# EAGLE board lidarsee PCB_r2 (EAGLE 7.7.0)
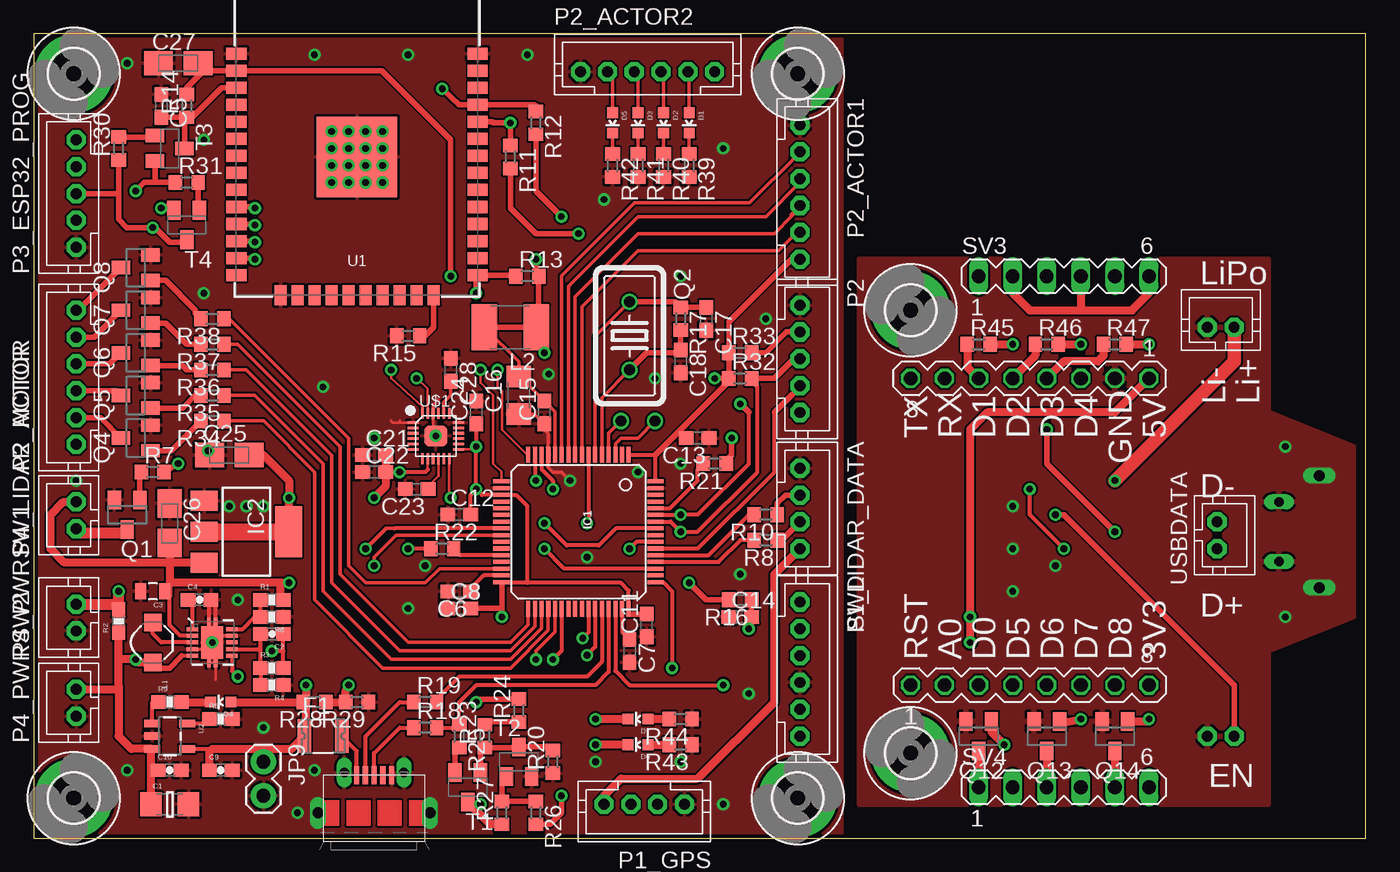
[diagram p0: board, top side]
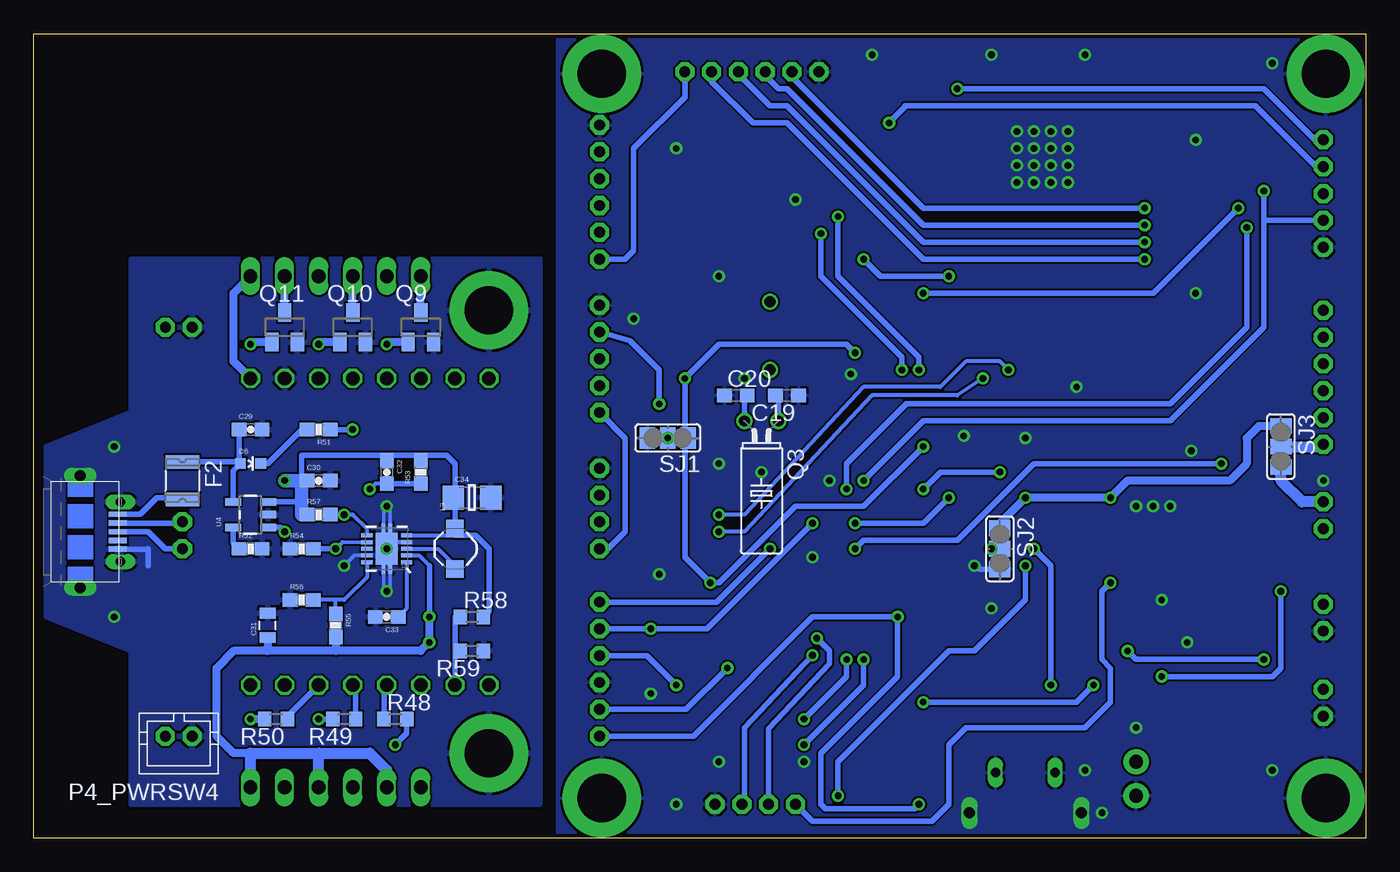
[diagram p1: board, bottom side, seen from below]

Size 99.37 x 60 mm. Coordinates in mm from the lower left corner, seen from the top.
Outline: 0,0 99.37,0 99.37,60 0,60 0,0
Copper layers (1*16): Top 0.035mm / dielectric 1.5mm / Bottom 0.035mm
Design rules "PCB-POOL Standard": minimum track width 0.15mm, minimum drill 0.3mm, track to track 0.15mm, track to pad 0.15mm, pad to pad 0.15mm, via to via 0.15mm, smd to smd 0.15mm, copper to edge 0.3mm, drill to drill 0.2mm, minimum pad ring 0.2mm, minimum via ring 0.15mm, stop-mask expansion 0.075mm, vias tented up to drill 0mil, thermal gap 0.2mm

## Footprints (pad centres in the part's own frame; a part is rotated, then mirrored left to right if it is on the bottom)
1206 = smd 1.6 x 1.8: 1 -1.4,0; 2 1.4,0
0603-CAP = smd 1.1 x 1: 1 -0.85,0; 2 0.85,0
0805 = smd 0.8 x 1.2: 1 -0.9,0; 2 0.9,0
C0603 = smd 1.1 x 1: 1 -0.85,0; 2 0.85,0
C1206 = smd 1.6 x 1.8: 1 -1.4,0; 2 1.4,0
A/3216-18W = smd 2.15 x 1.8: + 1.475,0; - -1.475,0
LED-0603 = smd 0.8 x 0.8: A 0,-0.75; C 0,0.75
1210L = smd 1 x 2.5: 1 -1.4,0; 2 1.4,0
3,6-PAD = drill 3.6 pad 5.842: B3,6 0,0
LQFP64 = smd 1.2 x 0.3: 1 -5.75,3.75; 2 -5.75,3.25; 3 -5.75,2.75; 4 -5.75,2.25; 5 -5.75,1.75; 6 -5.75,1.25; 7 -5.75,0.75; 8 -5.75,0.25; 9 -5.75,-0.25; 10 -5.75,-0.75; 11 -5.75,-1.25; 12 -5.75,-1.75; 13 -5.75,-2.25; 14 -5.75,-2.75; 15 -5.75,-3.25; 16 -5.75,-3.75; 33 5.75,-3.75; 34 5.75,-3.25; 35 5.75,-2.75; 36 5.75,-2.25; 37 5.75,-1.75; 38 5.75,-1.25; 39 5.75,-0.75; 40 5.75,-0.25; 41 5.75,0.25; 42 5.75,0.75; 43 5.75,1.25; 44 5.75,1.75; 45 5.75,2.25; 46 5.75,2.75; 47 5.75,3.25; 48 5.75,3.75 | smd 0.3 x 1.2: 17 -3.75,-5.75; 18 -3.25,-5.75; 19 -2.75,-5.75; 20 -2.25,-5.75; 21 -1.75,-5.75; 22 -1.25,-5.75; 23 -0.75,-5.75; 24 -0.25,-5.75; 25 0.25,-5.75; 26 0.75,-5.75; 27 1.25,-5.75; 28 1.75,-5.75; 29 2.25,-5.75; 30 2.75,-5.75; 31 3.25,-5.75; 32 3.75,-5.75; 49 3.75,5.75; 50 3.25,5.75; 51 2.75,5.75; 52 2.25,5.75; 53 1.75,5.75; 54 1.25,5.75; 55 0.75,5.75; 56 0.25,5.75; 57 -0.25,5.75; 58 -0.75,5.75; 59 -1.25,5.75; 60 -1.75,5.75; 61 -2.25,5.75; 62 -2.75,5.75; 63 -3.25,5.75; 64 -3.75,5.75
SOT223 = smd 1.5 x 2: 1 -2.3,-3.15; 2 0,-3.15; 3 2.3,-3.15 | smd 3.8 x 2: 4 0,3.15
1X02 = drill 1.016 pad 1.88: 1 0,0; 2 2.54,0
CDRH2D09 = smd 1.3 x 1.3: P$1 -1.5,0; P$2 1.5,0
L1812 = smd 1.9 x 3.4: 1 -1.95,0; 2 1.95,0
JST-PH4 = drill 0.813 pad 1.422 octagon: 1 0,0; 2 -2,0; 3 -4,0; 4 -6,0
JST-PH5 = drill 0.813 pad 1.422 octagon: 1 0,0; 2 -2,0; 3 -4,0; 4 -6,0; 5 -8,0
JST-PH6 = drill 0.813 pad 1.422 octagon: 1 0,0; 2 -2,0; 3 -4,0; 4 -6,0; 5 -8,0; 6 -10,0
JST-PH2 = drill 0.813 pad 1.422 octagon: 1 0,0; 2 -2,0
SOT23 = smd 1 x 1.4: 1 -0.95,-1.1; 2 0.95,-1.1; 3 0,1.1
HC18U-V = drill 0.813: 1 -2.54,0; 2 2.54,0
TC38H = drill 0.813: 1 -1.27,0; 2 1.27,0
0603-RES = smd 1.1 x 1: 1 -0.85,0; 2 0.85,0
R0603 = smd 1 x 1.1: 1 -0.85,0; 2 0.85,0
SJ_2 = smd 1.168 x 1.6: 1 -1.524,0; 2 0,0; 3 1.524,0
MA08-1S = drill 1.016 octagon: 1 -8.89,0; 2 -6.35,0; 3 -3.81,0; 4 -1.27,0; 5 1.27,0; 6 3.81,0; 7 6.35,0; 8 8.89,0
MA06-1 = drill 1.016 long: 1 -6.35,0; 2 -3.81,0; 3 -1.27,0; 4 1.27,0; 5 3.81,0; 6 6.35,0
SOT23-BEC = smd 1 x 1.4: B -0.95,-1.1; C 0,1.1; E 0.95,-1.1
ESP-WROOM-03 = smd 0.9 x 1.5: 1 7.7,9; 2 6.43,9; 3 5.16,9; 4 3.89,9; 5 2.62,9; 6 1.35,9; 7 0.08,9; 8 -1.19,9; 9 -2.46,9; 10 -3.73,9; 11 -5,9; 12 -6.27,9; 13 -7.54,9; 14 -8.81,9; 25 -8.81,-9; 26 -7.54,-9; 27 -6.27,-9; 28 -5,-9; 29 -3.73,-9; 30 -2.46,-9; 31 -1.19,-9; 32 0.08,-9; 33 1.35,-9; 34 2.62,-9; 35 3.89,-9; 36 5.16,-9; 37 6.43,-9; 38 7.7,-9 | smd 1.5 x 0.9: 15 -10.3,5.715; 16 -10.3,4.445; 17 -10.3,3.175; 18 -10.3,1.905; 19 -10.3,0.635; 20 -10.3,-0.635; 21 -10.3,-1.905; 22 -10.3,-3.175; 23 -10.3,-4.445; 24 -10.3,-5.715 | smd 6 x 6: GND 0,0
SOT23-5 = smd 0.55 x 1.2: 1 -0.95,-1.3; 2 0,-1.3; 3 0.95,-1.3; 4 0.95,1.3; 5 -0.95,1.3
QFN-10_PAD = smd 0.297 x 0.85: 1 -1,-1.475; 2 -0.5,-1.475; 3 0,-1.475; 4 0.5,-1.475; 5 1,-1.475; 6 1,1.475; 7 0.5,1.475; 8 0,1.475; 9 -0.5,1.475; 10 -1,1.475 | smd 0.7 x 0.28: 11 -1.5,0.25; 12 -1.5,-0.25; 13 1.5,0.25; 14 1.5,-0.25 | smd 2.4 x 1.65: 15 0,0
LEAD-QFN24 = smd 0.8 x 0.2: 1 -1.7,1; 2 -1.7,0.6; 3 -1.7,0.2; 4 -1.7,-0.2; 5 -1.7,-0.6; 6 -1.7,-1; 13 1.7,-1; 14 1.7,-0.6; 15 1.7,-0.2; 16 1.7,0.2; 17 1.7,0.6; 18 1.7,1 | smd 0.2 x 0.8: 7 -1,-1.7; 8 -0.6,-1.7; 9 -0.2,-1.7; 10 0.2,-1.7; 11 0.6,-1.7; 12 1,-1.7; 19 1,1.7; 20 0.6,1.7; 21 0.2,1.7; 22 -0.2,1.7; 23 -0.6,1.7; 24 -1,1.7 | smd 1.7 x 1.54: 25 0,0
47589-0001 = smd 1.35 x 0.4: 1 2.8,1.3; 2 2.8,0.65; 3 2.8,0; 4 2.8,-0.65; 5 2.8,-1.3 | drill 0.8 pad 0.95 long: CASING1 0,4.175; CASING2 0,-4.175 | drill 0.7 pad 0.9 long: CASING3 3,2.225; CASING4 3,-2.225

## Placement (x,y rotation side)
C1  10uF  [1206]  10.16,2.54 0 top
C2  0.1uF  [0603-CAP]  17.78,15.24 180 top
C3  100n  [0805]  8.89,18.41 180 top
C4  0.1uF  [0603-CAP]  12.38,17.78 0 top
C5  100n  [C0603]  9.53,54.61 270 top
C6  2.2µF 6.3V  [C0603]  31.75,18.41 180 top
C7  2.2µF 6.3V  [C0603]  44.45,13.97 270 top
C8  100n  [C0603]  31.75,17.14 0 top
C9  4.7uF  [0603-CAP]  13.97,5.08 0 top
C10  4.7uF  [0603-CAP]  10.16,5.08 0 top
C11  100n  [C0603]  45.72,15.88 90 top
C12  100n  [C0603]  31.75,24.13 0 top
C13  100n  [C0603]  49.53,29.84 180 top
C14  100n  [C0603]  52.7,16.51 0 top
C15  100n  [C0603]  38.1,31.75 90 top
C16  10u 10V  [C1206]  36.2,33.02 90 top
C17  27p  [C0603]  50.16,38.73 270 top
C18  27p  [C0603]  48.26,35.56 270 top
C19  10p  [C0603]  43.18,33.02 180 bottom
C20  10p  [C0603]  46.99,33.02 0 bottom
C21  1µ  [C0603]  25.4,28.57 0 top
C22  100n  [C0603]  25.4,27.3 0 top
C23  100n  [C0603]  28.57,26.04 180 top
C24  10n  [C0603]  33.02,31.75 90 top
C25  33µF  [A/3216-18W]  14.61,28.57 0 top
C26  33µF  [A/3216-18W]  10.16,23.5 270 top
C27  33µF  [A/3216-18W]  10.79,57.78 0 top
C28  2.2n  [C0603]  31.11,34.92 270 top
C29  4.7uF  [0603-CAP]  83.19,30.48 0 bottom
C30  4.7uF  [0603-CAP]  78.11,26.67 0 bottom
C31  100n  [0805]  81.92,15.88 90 bottom
C32  0.1uF  [0603-CAP]  73.03,27.3 270 bottom
C33  0.1uF  [0603-CAP]  73.03,16.51 180 bottom
C34  10uF  [1206]  66.67,25.4 0 bottom
D1  red  [LED-0603]  48.9,53.34 180 top
D2  red  [LED-0603]  46.99,53.34 180 top
D3  red  [LED-0603]  45.09,53.34 180 top
D4  red  [LED-0603]  13.97,10.16 90 top
D5  red  [LED-0603]  43.18,53.34 180 top
D6  red  [LED-0603]  45.09,6.99 90 top
D7  red  [LED-0603]  45.09,8.89 90 top
D8  red  [LED-0603]  83.19,27.94 270 bottom
F1  1210L010  [1210L]  21.59,7.62 0 top
F2  1210L010  [1210L]  88.27,26.67 270 bottom
H1  MOUNT-PAD-ROUND3.6  [3,6-PAD]  65.41,6.35 90 top
H2  MOUNT-PAD-ROUND3.6  [3,6-PAD]  65.41,39.37 90 top
H5  MOUNT-PAD-ROUND3.6  [3,6-PAD]  3,3 0 top
H6  MOUNT-PAD-ROUND3.6  [3,6-PAD]  57,3 0 top
H7  MOUNT-PAD-ROUND3.6  [3,6-PAD]  57,57 0 top
H8  MOUNT-PAD-ROUND3.6  [3,6-PAD]  3,57 0 top
IC1  STM32F40X  [LQFP64]  40.64,22.86 270 top
IC2  LD1117ASTR  [SOT223]  15.88,22.86 270 top
JP9  IN  [1X02]  17.14,5.71 270 top
L1  4.7uH, 1.2A  [CDRH2D09]  8.89,14.61 270 top
L2  [L1812]  35.56,38.1 180 top
L3  4.7uH, 1.2A  [CDRH2D09]  67.94,21.59 90 bottom
P1_GPS  [JST-PH4]  42.55,2.54 180 top
P1_LIDAR_DATA  [JST-PH4]  57.15,21.59 270 top
P2  JST-PH5  [JST-PH5]  57.15,31.75 270 top
P2_ACTOR  [JST-PH6]  3.17,39.37 90 top
P2_ACTOR1  [JST-PH6]  57.15,43.18 270 top
P2_ACTOR2  [JST-PH6]  50.8,57.15 0 top
P3_ESP32_PROG  JST-PH5  [JST-PH5]  3.17,52.07 90 top
P4_LIDAR_MOTOR  [JST-PH2]  3.17,25.08 90 top
P4_PWRSW1  [JST-PH2]  3.17,17.46 90 top
P4_PWRSW2  [JST-PH2]  3.17,11.11 90 top
P4_PWRSW3  [JST-PH2]  89.53,38.1 0 top
P4_PWRSW4  [JST-PH2]  89.53,7.62 180 bottom
Q1  IRLML6344  [SOT23]  6.99,24.13 180 top
Q2  8MHz  [HC18U-V]  44.45,37.47 270 top
Q3  32768  [TC38H]  45.09,31.11 180 bottom
Q4  IRLML6344  [SOT23]  7.62,29.84 90 top
Q5  IRLML6344  [SOT23]  7.62,33.02 90 top
Q6  IRLML6344  [SOT23]  7.62,36.2 90 top
Q7  IRLML6344  [SOT23]  7.62,39.37 90 top
Q8  IRLML6344  [SOT23]  7.62,42.55 90 top
Q9  IRLML6344  [SOT23]  70.48,38.1 0 bottom
Q10  IRLML6344  [SOT23]  75.56,38.1 0 bottom
Q11  IRLML6344  [SOT23]  80.64,38.1 0 bottom
Q12  IRLML6344  [SOT23]  70.48,7.62 180 top
Q13  IRLML6344  [SOT23]  75.56,7.62 180 top
Q14  IRLML6344  [SOT23]  80.64,7.62 180 top
R1  1.2M  [0603-RES]  17.78,17.78 0 top
R2  10k  [0603-RES]  6.35,16.19 90 top
R3  2M  [0603-RES]  17.78,12.7 0 top
R4  220k  [0603-RES]  17.78,11.43 180 top
R5  2k  [0603-RES]  13.97,8.89 0 top
R6  220k  [0603-RES]  17.78,16.51 180 top
R7  10  [R0603]  8.89,27.3 0 top
R8  10  [R0603]  54.61,22.23 180 top
R9  470  [0603-RES]  10.16,10.16 0 top
R10  10  [R0603]  54.61,24.13 180 top
R11  10  [R0603]  35.56,50.8 270 top
R12  10  [R0603]  37.47,53.34 270 top
R13  10  [R0603]  36.83,41.91 0 top
R14  10  [R0603]  11.43,54.61 90 top
R15  10  [R0603]  27.94,37.47 180 top
R16  10  [R0603]  52.7,17.78 180 top
R17  1M  [R0603]  48.26,38.73 270 top
R18  22  [R0603]  29.21,8.26 0 top
R19  22  [R0603]  29.21,10.16 0 top
R20  33k  [R0603]  38.73,5.71 90 top
R21  33k  [R0603]  50.8,27.94 180 top
R22  33k  [R0603]  30.48,21.59 0 top
R23  10k  [R0603]  33.66,7.62 90 top
R24  22  [R0603]  36.2,9.53 90 top
R25  1k5  [R0603]  31.75,7.62 270 top
R26  1k  [R0603]  37.47,1.91 270 top
R27  47k  [R0603]  34.92,1.91 90 top
R28  15k  [R0603]  20.95,10.16 180 top
R29  22k  [R0603]  24.13,10.16 180 top
R30  12k  [R0603]  6.35,51.44 90 top
R31  12k  [R0603]  11.43,48.9 0 top
R32  33k  [R0603]  52.7,34.29 0 top
R33  33k  [R0603]  52.7,36.2 0 top
R34  10  [R0603]  13.34,31.11 180 top
R35  10  [R0603]  13.34,33.02 180 top
R36  10  [R0603]  13.34,34.92 180 top
R37  10  [R0603]  13.34,36.83 180 top
R38  10  [R0603]  13.34,38.73 180 top
R39  12k  [R0603]  48.9,50.16 270 top
R40  12k  [R0603]  46.99,50.16 270 top
R41  12k  [R0603]  45.09,50.16 270 top
R42  12k  [R0603]  43.18,50.16 270 top
R43  12k  [R0603]  48.26,6.99 180 top
R44  12k  [R0603]  48.26,8.89 180 top
R45  10  [R0603]  70.48,36.83 0 top
R46  10  [R0603]  75.56,36.83 0 top
R47  10  [R0603]  80.64,36.83 0 top
R48  10  [R0603]  72.39,8.89 0 bottom
R49  10  [R0603]  76.2,8.89 180 bottom
R50  10  [R0603]  81.28,8.89 180 bottom
R51  470  [0603-RES]  78.11,30.48 180 bottom
R52  2k  [0603-RES]  83.19,21.59 0 bottom
R53  2M  [0603-RES]  70.48,27.3 90 bottom
R54  220k  [0603-RES]  79.38,21.59 0 bottom
R55  1.2M  [0603-RES]  76.83,15.88 270 bottom
R56  220k  [0603-RES]  79.38,17.78 0 bottom
R57  10k  [0603-RES]  78.11,24.13 0 bottom
R58  10  [R0603]  66.67,16.51 0 bottom
R59  10  [R0603]  66.67,13.97 180 bottom
SJ1  [SJ_2]  52.07,29.84 180 bottom
SJ2  [SJ_2]  27.3,21.59 270 bottom
SJ3  [SJ_2]  6.35,29.21 270 bottom
SV1  [MA08-1S]  74.3,34.29 180 top
SV2  [MA08-1S]  74.3,11.43 0 top
SV3  [MA06-1]  76.83,41.91 0 top
SV4  [MA06-1]  76.83,3.81 0 top
SWD  [JST-PH6]  57.15,7.62 270 top
T1  [SOT23-BEC]  32.38,3.81 180 top
T2  [SOT23-BEC]  36.2,5.71 0 top
T3  [SOT23-BEC]  10.16,51.44 270 top
T4  [SOT23-BEC]  11.43,45.72 180 top
U1  ESP-WROOM-03  [ESP-WROOM-03]  24.13,50.8 90 top
U2  MCP73831  [SOT23-5]  10.16,7.62 270 top
U3  TPS61200  [QFN-10_PAD]  13.34,14.61 270 top
U4  MCP73831  [SOT23-5]  83.19,24.13 90 bottom
U5  TPS61200  [QFN-10_PAD]  73.03,21.59 90 bottom
U$1  MPU-9250  [LEAD-QFN24]  30,30 0 top
U$2  MICRO-USB-RECEPTACLE47589-0001  [47589-0001]  25.4,1.91 90 top
U$3  MICRO-USB-RECEPTACLE47589-0001  [47589-0001]  95.89,22.86 0 bottom
USBDATA  [JST-PH2]  88.27,21.59 270 top

## Library data of the parts
C1 C34 = CH_passive; MF: KEMET; MPN: C1206C106K8RACTU; OC_FARNELL: 1288264
C2 C4 C32 C33 = SparkFun; MF: YAGEO (PHYCOMP); MPN: CC0603MRY5V9BB104; OC_FARNELL: 431989
C3 = CH_passive; MF: KEMET; MPN: C0603C104K5RACTU; OC_FARNELL: 1288255
C5 C8 C11-C15 C22 C23 = rcl; MF: KEMET; MPN: C0603C104K5RACTU; OC_FARNELL: 1288255
C6 C7 = rcl; MF: KEMET; MPN: C0603C225K9PACTU; OC_FARNELL: 1288257
C9 C10 C29 C30 = SparkFun; MF: KEMET; MPN: C0603C475K8PACTU; OC_FARNELL: 1572625
C16 = rcl; MF: KEMET; MPN: C1206C106K8RACTU; OC_FARNELL: 1288264
C17 C18 = rcl; MF: YAGEO (PHYCOMP); MPN: CC0603JRNPO9BN270; OC_FARNELL: 722017
C19 C20 = rcl; MF: AVX; MPN: 06035A102JAT2A; OC_FARNELL: 317202
C21 = rcl; MF: AVX; MPN: 0603YC105KAT2A; OC_FARNELL: 1658870
C24 = rcl; MF: YAGEO (PHYCOMP); MPN: CC0603KRX7R9BB103; OC_FARNELL: 722236
C25-C27 = rcl; MF: AVX; MPN: TPSA336M006R0600; OC_FARNELL: 2333095
C28 = rcl; MF: YAGEO (PHYCOMP); MPN: CC0603KRX7R9BB222; OC_FARNELL: 722194
C31 = CH_passive; MF: YAGEO (PHYCOMP); MPN: CC0603MRY5V9BB104; OC_FARNELL: 431989
D1-D8 = SparkFun; MF: OSRAM; MPN: LSQ976-Z; OC_FARNELL: 1226390
F1 F2 = polyfuse-smd_10; MF: LITTELFUSE; MPN: 1210L010WR; OC_FARNELL: 1822206; OC_NEWARK: 18M4781
H1 H2 H5-H8 = holes_new; OC_FARNELL: unknown
IC1 = pel_stm32; MF: STMICROELECTRONICS; MPN: STM32F405RGT6; OC_FARNELL: 2064363
IC2 = v-reg; MF: ON SEMICONDUCTOR; MPN: NCP1117ST33T3G; OC_FARNELL: 1652366
JP9 = SparkFun; MF: JST (JAPAN SOLDERLESS TERMINALS); MPN: B2B-PH-K-S(LF)(SN); OC_FARNELL: 9491856
L1 L3 = SparkFun; MF: MURATA; MPN: LQH3NPN4R7MJ0L; OC_FARNELL: 2219271
L2 = rcl; OC_FARNELL: unknown
P1_GPS P1_LIDAR_DATA = jst-ph; MF: JST (JAPAN SOLDERLESS TERMINALS); MPN: B4B-PH-K-S(LF)(SN); OC_FARNELL: 9492437
P2 P3_ESP32_PROG = jst-ph; MF: JST (JAPAN SOLDERLESS TERMINALS); MPN: B5B-PH-K-S(LF)(SN); OC_FARNELL: 9492445
P2_ACTOR P2_ACTOR1 P2_ACTOR2 SWD = jst-ph; MF: JST (JAPAN SOLDERLESS TERMINALS); MPN: B6B-PH-K-S(LF)(SN); OC_FARNELL: 9492453
P4_LIDAR_MOTOR P4_PWRSW1-P4_PWRSW4 USBDATA = jst-ph; MF: JST (JAPAN SOLDERLESS TERMINALS); MPN: B2B-PH-K-S(LF)(SN); OC_FARNELL: 9491856
Q1 Q4-Q14 = myDBv7; MF: INFINEON; MPN: IRLML6344TRPBF; OC_FARNELL: 1857299
Q2 = crystal; MF: MULTICOMP; MPN: HC49S-8-30-50-70-30-ATF; OC_FARNELL: 1666997; OC_NEWARK: unknown
Q3 = crystal; MF: CITIZEN FINETECH MIYOTA; MPN: CFS206 32.768KDZB-UB; OC_FARNELL: 1457085; OC_NEWARK: unknown
R1 R55 = SparkFun; MF: MULTICOMP; MPN: MCMR06W2004FTL; OC_FARNELL: 2073340
R2 R57 = SparkFun; MF: MULTICOMP; MPN: MCMR06X1002FTL; OC_FARNELL: 2073349
R3 R53 = SparkFun; MF: KOA SPEER ELECTRONICS; MPN: RK73H1JTTD1204F; OC_FARNELL: 1811595
R4 R6 R54 R56 = SparkFun; MF: MULTICOMP; MPN: MCHP03W8F2203T5E; OC_FARNELL: 1576314
R5 R52 = SparkFun; MF: YAGEO (PHYCOMP); MPN: RC0603FR-072K2L.; OC_FARNELL: 9238522
R7 R8 R10-R16 R34-R38 R45-R50 R58 R59 = rcl; MF: VISHAY; MPN: CRCW060310R0FKEA; OC_FARNELL: 1469751
R9 R51 = SparkFun; MF: MULTICOMP; MPN: MCHP03W8F4700T5E; OC_FARNELL: 1576273
R17 = rcl; MF: VISHAY; MPN: CRCW06031M00FKEA; OC_FARNELL: 1469746
R18 R19 R24 = rcl; MF: VISHAY; MPN: CRCW060322R0FKEA; OC_FARNELL: 1469781
R20-R22 R32 R33 = rcl; MF: VISHAY; MPN: CRCW060333K0FKEA; OC_FARNELL: 1469801
R23 = rcl; MF: MULTICOMP; MPN: MCMR06X1002FTL; OC_FARNELL: 2073349
R25 = rcl; MF: MULTICOMP; MPN: MCMR06X1501FTL; OC_FARNELL: 2073391
R26 = rcl; MF: VISHAY; MPN: CRCW06031K00FKEA; OC_FARNELL: 1469740
R27 = rcl; MF: VISHAY; MPN: CRCW060347K0FKEA; OC_FARNELL: 1469811
R28 = rcl; MF: VISHAY; MPN: CRCW060315K0FKEA; OC_FARNELL: 1469758
R29 = rcl; MF: TE CONNECTIVITY / NEOHM; MPN: CPF0603F4K22C1; OC_FARNELL: 1527541
R30 R31 R39-R44 = rcl; MF: MULTICOMP; MPN: MC0063W060312K8; OC_FARNELL: 1170832
SJ1-SJ3 = jumper; OC_FARNELL: unknown
SV1-SV4 = con-pin-header; OC_FARNELL: unknown
T1-T4 = transistor; MF: NEXPERIA; MPN: BC817,215; OC_FARNELL: 1081223
U1 = esp32; OC_FARNELL: unknown
U2 U4 = SparkFun; MF: MICROCHIP; MPN: MCP73831T-2ACI/OT; OC_FARNELL: 1332158
U3 U5 = SparkFun; MF: TEXAS INSTRUMENTS; MPN: TPS61200DRCT; OC_FARNELL: 1471238
U$1 = invensense; MF: INVENSENSE; MPN: MPU-6050; OC_FARNELL: 1864742
U$2 U$3 = con-molex-usb; MF: MOLEX; MPN: 47589-0001; OC_FARNELL: 1568023

## Nets
5VIN: C9.1 D4.A F1.1 JP9.1 R24.2 R28.2 U2.4
5VIN1: C29.1 D8.A F2.1 U4.4
+3V1: SV2.8
+3V3: C8.2 C11.2 C12.2 C13.2 C15.2 C16.2 C21.2 C22.2 C24.1 C25.+ C27.+ IC1.1 IC1.12 IC1.19 IC1.32 IC1.48 IC1.64 IC2.2 IC2.4 L2.1 L2.2 P2_ACTOR1.1 P2_ACTOR2.1 R13.2 R14.2 R16.2 R27.1 R32.1 R33.1 SJ1.1 SJ2.1 SJ3.1 SWD.1 T1.C U1.2 U$1.8 U$1.13
+5V: C3.1 C26.+ IC2.3 P1_GPS.1 P1_LIDAR_DATA.1 P2.1 P4_LIDAR_MOTOR.1 R1.2 SJ3.3 U3.2
+5V1: C31.1 R55.2 SV1.1 SV3.2 SV3.4 SV3.6 SV4.2 SV4.4 SV4.6 U5.2
A0: R58.1 R59.2 SV2.2
BOOT0: IC1.60 R21.2
BOOT1: IC1.28 R22.2
D0: SV2.3
D1: R45.1 SV1.6
D2: R46.1 SV1.5
D3: R47.1 SV1.4
D4: SV1.3
D5: R48.1 SV2.4
D6: R49.1 SV2.5
D7: R50.1 SV2.6
D8: SV2.7
D+: R18.1 U$2.3
D+1: U$3.3 USBDATA.1
D-: R19.1 U$2.2
D-1: U$3.2 USBDATA.2
DISC: IC1.25 R26.2
EINT: IC1.54 P2.2
EN: P4_PWRSW1.1 R2.2 U3.6
EN1: P4_PWRSW4.1 R57.2 U5.6
ESP_DTR: IC1.14 P3_ESP32_PROG.3 R30.1 T4.C
ESP_EN: C5.2 R14.1 T3.C U1.3
ESP_RTS: IC1.15 P3_ESP32_PROG.4 R31.1 T3.E
ESP_RX: IC1.16 R11.2
ESP_RXD: P3_ESP32_PROG.2 R11.1 U1.34
ESP_TX: IC1.17 R12.2
ESP_TXD: P3_ESP32_PROG.1 R12.1 U1.35
FB: R1.1 R6.2 U3.10
FB1: R55.1 R56.2 U5.10
GND: C1.2 C3.2 C4.2 C5.1 C6.2 C7.2 C8.1 C9.2 C10.2 C11.1 C12.1 C13.1 C14.1 C15.1 C16.1 C17.2 C18.2 C19.1 C20.1 C21.1 C22.1 C23.2 C24.2 C25.- C26.- C27.- C28.1 H5.B3,6 H6.B3,6 H7.B3,6 H8.B3,6 IC1.13 IC1.18 IC1.63 IC2.1 JP9.2 P1_GPS.4 P1_LIDAR_DATA.4 P2.5 P2_ACTOR1.6 P2_ACTOR2.6 P3_ESP32_PROG.5 P4_PWRSW1.2 P4_PWRSW2.2 Q1.2 Q4.2 Q5.2 Q6.2 Q7.2 Q8.2 R4.1 R5.2 R6.1 R15.2 R20.1 R29.1 R39.2 R40.2 R41.2 R42.2 R43.1 R44.1 SJ1.3 SJ2.3 SWD.3 T2.E U1.1 U1.15 U1.38 U1.GND U2.2 U3.4 U3.9 U3.11 U3.12 U3.13 U3.14 U3.15 U$1.1 U$1.18 U$1.22 U$1.25 U$2.5 U$2.CASING1 U$2.CASING2 U$2.CASING3 U$2.CASING4
GND1: C29.2 C30.2 C31.2 C33.2 C34.2 H1.B3,6 H2.B3,6 P4_PWRSW3.2 P4_PWRSW4.2 Q9.2 Q10.2 Q11.2 Q12.2 Q13.2 Q14.2 R52.2 R54.1 R56.1 R59.1 SV1.2 U4.2 U5.4 U5.9 U5.11 U5.12 U5.13 U5.14 U5.15 U$3.5 U$3.CASING1 U$3.CASING2 U$3.CASING3 U$3.CASING4
IO0: R13.1 T4.E U1.25
IO2: R15.1 U1.24
LIDAR_PWM: IC1.51 R7.2
LIDAR_RX: IC1.53 R10.2
LIDAR_TX: IC1.52 R8.2
M1: IC1.30 R38.1
M2: IC1.33 R37.1
M3: IC1.34 R36.1
M4: IC1.35 R35.1
M5: IC1.36 R34.1
MPU_INT: IC1.57 U$1.12
N$1: C4.1 U3.1
N$2: L1.P$1 U3.3
N$3: C28.2 U$1.20
N$4: P4_LIDAR_MOTOR.2 Q1.3
N$5: Q1.1 R7.1
N$6: P1_LIDAR_DATA.2 R8.1
N$7: P1_LIDAR_DATA.3 R10.1
N$8: D4.C R9.2
N$9: C23.1 U$1.10
N$10: IC1.8 P2_ACTOR1.2
N$11: R5.1 U2.5
N$12: P2_ACTOR.5 Q4.3
N$13: R31.2 T4.B
N$14: R9.1 U2.1
N$15: P2_ACTOR.4 Q5.3
N$16: C17.1 IC1.6 Q2.1 R17.1
N$17: P2_ACTOR.3 Q6.3
N$18: P2_ACTOR.2 Q7.3
N$19: C18.1 IC1.5 Q2.2 R17.2
N$20: C19.2 IC1.4 Q3.1
N$21: C20.2 IC1.3 Q3.2
N$22: R20.2 R23.1 T1.B T2.C
N$23: R21.1 SJ1.2
N$24: R22.1 SJ2.2
N$25: P2_ACTOR.1 Q8.3
N$26: R25.2 T1.E
N$27: R23.2 R24.1
N$28: R26.1 R27.2 T2.B
N$29: R30.2 T3.B
N$30: P2_ACTOR.6 SJ3.2
N$31: Q4.1 R34.2
N$32: Q5.1 R35.2
N$33: Q6.1 R36.2
N$34: Q7.1 R37.2
N$35: Q8.1 R38.2
N$36: IC1.9 P2_ACTOR1.3
N$37: IC1.10 P2_ACTOR1.4
N$38: IC1.11 P2_ACTOR1.5
N$39: D5.A P2_ACTOR2.5 U1.10
N$40: D3.A P2_ACTOR2.4 U1.11
N$41: D2.A P2_ACTOR2.3 U1.12
N$42: D1.A P2_ACTOR2.2 U1.13
N$43: D1.C R39.1
N$44: D2.C R40.1
N$45: D3.C R41.1
N$46: D5.C R42.1
N$47: Q9.1 R45.2
N$48: D6.C IC1.37
N$49: D7.C IC1.38
N$50: D6.A R43.2
N$51: D7.A R44.2
N$52: Q10.1 R46.2
N$53: Q11.1 R47.2
N$54: Q9.3 SV3.1
N$55: Q10.3 SV3.3
N$56: Q11.3 SV3.5
N$57: Q12.1 R48.2
N$58: Q13.1 R49.2
N$59: Q14.1 R50.2
N$60: Q12.3 SV4.1
N$61: Q13.3 SV4.3
N$62: Q14.3 SV4.5
N$63: R52.1 U4.5
N$64: R51.1 U4.1
N$65: D8.C R51.2
N$66: L3.P$1 U5.3
N$67: C33.1 U5.1
NRST: C14.2 IC1.7 R16.1 SWD.5
RST: SV2.1
RX: SV1.7
SCL: IC1.58 P2.3 R32.2 U$1.23
SDA: IC1.59 P2.4 R33.2 U$1.24
SWCLK: IC1.49 SWD.2
SWDIO: IC1.46 SWD.4
TRACESWO: IC1.55 SWD.6
TX: SV1.8
UART1_TX: IC1.42 P1_GPS.2
UART2_RX: IC1.43 P1_GPS.3
USB_D+: IC1.45 R18.2 R25.1
USB_D-: IC1.44 R19.2
USBP_E: IC1.24 R28.1 R29.2
UVLO: C2.2 R3.1 R4.2 U3.7
UVLO1: C32.2 R53.1 R54.2 U5.7
VBATT: C1.1 C2.1 C10.1 L1.P$2 P4_PWRSW2.1 R2.1 R3.2 U2.3 U3.5
VBATT1: C30.1 C32.1 C34.1 L3.P$2 P4_PWRSW3.1 R53.2 R57.1 R58.2 U4.3 U5.5
VBUS: F1.2 U$2.1
VBUS1: F2.2 U$3.1
VCAP1: C6.1 IC1.31
VCAP2: C7.1 IC1.47

## Tracks (layer width: path | path; a pad name or v marks a point on that pad's centre or on a via)
5VIN  (via drill 0.5)
  Top 0.305: U2.4 13.34,6.67 13.12,6.46 | F1.1 20.19,7.75 20.32,8.26 | 20.32,10.16 R28.2 20.32,9.95
  Top 0.406: R24.2 33.23,10.38 v33.02,10.16
  Top 0.61: 13.34,6.67 17.14,6.67 | JP9.1 17.14,6.67 | D4.A R28.2 | v20.32,11.43 20.32,10.16 | 20.32,8.26 20.32,9.95 | 17.14,6.67 19.24,6.67 F1.1 | C9.1 13.12,6.46
  Bottom 0.406: v33.02,10.16 21.59,10.16 v20.32,11.43
5VIN1
  Bottom 0.406: U4.4 84.48,27.39 D8.A | C29.1 84.03,28.04 D8.A | F2.1 84.06,28.07 D8.A
+3V3  (via drill 0.5)
  Top 0.2: R13.2 37.47,41.91 | U$1.8 29.4,27.5 | U$1.13 32.81,29 v33.02,29.21 | 46.39,28.54 46.35,28.57 46.32,28.61 | R32.1 51.85,34.08 | 34.92,19.05 34.89,19.09 IC1.32 35.5,19.11 | 44.46,16.73 IC1.48 | C13.2 48.05,30.06 47.94,30.16
  Top 0.254: v38.1,36.2 38.1,37.51 L2.1 | IC1.12 38.89,31.81 C15.2 36.28,34.42 C16.2 36.2,35.52 L2.2
  Top 0.305: 19.05,22.86 IC2.4 | 29.4,27.5 29.21,27.3 v27.3,27.3 C22.2 | v33.02,26.04 33.45,25.61 IC1.19 35.98,25.61 36.83,24.77 36.83,19.05 | v33.02,26.04 v33.02,29.21 C24.1 | IC1.64 46.39,28.54 | IC1.1 46.32,28.61 | IC1.48 44.39,18.48 43.81,19.05 36.83,19.05 | 36.83,19.05 35.56,19.05 35.5,19.11 | C12.2 32.6,25.61 v33.02,26.04 | 32.22,2.54 T1.C
  Top 0.406: 51.85,34.08 47.94,30.16 46.35,28.57 | v31.11,41.91 31.11,52.07 25.95,57.23 U1.2 12.7,57.23 | 34.92,19.05 34.92,17.14 | 34.92,17.14 v34.92,16.51 | C11.2 44.46,16.73 | C8.2 34.92,17.14 | R16.2 50.16,17.78 v48.9,19.05 | P2_ACTOR1.1 56.52,43.18 51.85,38.52 R33.1 R32.1 v50.8,34.29 | v38.1,36.2 38.1,38.1 L2.1 | L2.1 L2.2 | 12.7,57.23 12.14,57.23 12.06,57.15 12.06,57.53 C27.+ | R14.2 11.43,55.96 12.7,57.23 | L2.1 37.68,38.1 R13.2 | 37.47,41.91 v37.47,43.18 | 32.22,2.54 v33.34,2.54
  Top 0.61: C21.2 C22.2 26.25,26.25 v25.4,25.4 | R27.1 34.04,1.05 T1.C | 19.05,22.86 v19.05,25.4 19.05,26.67 17.14,28.57 C25.+
  Top 1.27: IC2.2 IC2.4
  Bottom 0.2: v34.92,16.51 34.89,16.51 34.89,16.48 v34.92,16.51
  Bottom 0.305: SJ2.1 27.3,23.5 | SJ1.1 50.8,29.84
  Bottom 0.406: v33.02,26.04 31.75,27.3 v27.3,27.3 | v33.02,29.21 37.47,24.77 42.55,24.77 48.26,19.05 v48.9,19.05 50.8,20.95 50.8,29.84 v50.8,34.29 48.26,36.83 38.73,36.83 v38.1,36.2 | v31.11,41.91 36.2,41.91 v37.47,43.18 | SWD.1 50.16,7.62 41.27,16.51 v34.92,16.51 34.92,12.06 40.64,6.35 40.64,2.54 40.32,2.22 33.66,2.22 v33.34,2.54 | P2_ACTOR2.1 50.8,55.24 54.61,51.44 54.61,43.81 55.24,43.18 P2_ACTOR1.1
  Bottom 0.61: 27.3,23.5 v25.4,25.4 v19.05,25.4 17.78,26.67 10.16,26.67 8.89,27.94 8.89,29.84 8,30.73 SJ3.1
+5V  (via drill 0.5)
  Top 0.2: 18.43,19.04 18.43,19.07 | 19.04,19.07 v19.05,19.05
  Top 0.254: R1.2 18.41,17.78 18.43,17.8 | 18.43,19.04 18.41,19.05
  Top 0.305: U3.2 10.93,15.11 10.16,15.88 10.16,18.79 C3.1 10.19,18.02 10.19,19.05 10.16,19.05 | 10.16,20.32 10.4,20.56 10.16,20.56
  Top 0.406: 10.16,20.56 10.16,20.32
  Top 0.61: 10.16,20.32 10.16,19.05 | IC2.3 10.4,20.56 | P4_LIDAR_MOTOR.1 2.22,25.08 1.27,24.13 1.27,21.59 2.3,20.56 10.16,20.56 C26.+ | 18.43,17.8 18.43,19.04 | 18.41,19.05 10.19,19.05 | 18.43,19.07 19.04,19.07 | P1_GPS.1 42.55,3.17 43.81,4.45 49.53,4.45 55.24,10.16 55.24,19.68 P1_LIDAR_DATA.1
  Bottom 0.406: P1_GPS.1 41.27,1.27 32.38,1.27 31.11,2.54 31.11,6.99 29.84,8.26 20.95,8.26 19.05,10.16 19.05,12.7 19.68,13.34 19.68,18.41 v19.05,19.05 | P2.1 55.24,29.84 55.24,22.86 56.52,21.59 P1_LIDAR_DATA.1
  Bottom 0.813: P4_LIDAR_MOTOR.1 4.76,25.08 6.35,26.67 SJ3.3
+5V1  (via drill 0.5)
  Top 0.61: SV3.2 73.03,40.64 74.3,39.37 78.11,39.37 | SV3.4 78.11,39.37 | 78.11,39.37 81.92,39.37 83.19,40.64 SV3.6 | SV1.1 80.64,31.75 71.12,31.75 69.85,30.48 v69.85,16.51 v69.85,14.61
  Bottom 0.305: U5.2 70.62,21.09 69.85,20.32
  Bottom 0.406: 69.85,20.32 v69.85,16.51
  Bottom 0.61: SV1.1 84.45,35.56 84.45,40.64 SV3.6 | 83.19,6.35 84.45,6.35 85.72,7.62 85.72,12.7 84.45,13.97 81.92,13.97 | 76.83,13.97 70.48,13.97 v69.85,14.61 v69.85,16.51 | 76.83,13.97 81.92,13.97 | R55.2 76.83,13.97 | C31.1 81.92,13.97
  Bottom 0.813: SV4.6 83.19,6.35 78.11,6.35 | 78.11,6.35 74.3,6.35 73.03,5.08 SV4.2 | SV4.4 78.11,6.35
A0
  Bottom 0.406: SV2.2 67.94,13.97 | 67.94,13.97 67.94,16.51 R58.1 | R59.2 67.94,13.97
BOOT0
  Top 0.305: IC1.60 47.47,24.61 49.53,26.67 49.53,27.52 R21.2
BOOT1
  Top 0.305: IC1.28 31.81,21.11 R22.2
D1
  Top 0.61: R45.1 69.64,35.14 SV1.6
D2
  Top 0.61: R46.1 74.72,35.98 SV1.5
D3
  Top 0.61: R47.1 79.8,35.98 79.38,35.56 76.83,35.56 SV1.4
D5
  Bottom 0.406: R48.1 73.24,11.21 SV2.4
D6
  Bottom 0.406: R49.1 75.35,11.21 SV2.5
D7
  Bottom 0.406: R50.1 80.43,9.11 SV2.6
D+
  Top 0.305: R18.1 27.3,8.26 25.4,6.35 U$2.3
D+1
  Bottom 0.406: USBDATA.1 89.53,21.59 90.81,22.86 U$3.3
D-
  Top 0.305: R19.1 27.3,10.16 24.75,7.61 U$2.2
D-1
  Bottom 0.406: U$3.2 88.34,23.51 USBDATA.2
DISC  (via drill 0.5)
  Top 0.254: IC1.25 27.05,22.61 25.4,20.95 v25.4,20.32
  Top 0.406: R26.2 38.52,1.05 39.37,1.91 v39.37,3.17
  Bottom 0.406: v25.4,20.32 25.4,17.78 29.21,13.97 31.11,13.97 39.37,5.71 v39.37,3.17
EINT
  Top 0.305: IC1.54 49.55,21.61 55.24,27.3 55.24,31.75
  Top 0.406: P2.2 56.61,33.12 55.24,31.75
EN  (via drill 0.5)
  Top 0.305: U3.6 14.81,12.49 v15.24,12.06 | v6.35,18.41 6.37,18.41
  Top 0.61: 6.37,18.41 R2.2
  Top 0.813: P4_PWRSW1.1 6.35,17.46 v6.35,18.41
  Bottom 0.406: v15.24,12.06 6.99,12.06 6.35,12.7 v6.35,18.41
EN1  (via drill 0.5)
  Top 0.406: P4_PWRSW4.1 89.53,11.43 76.83,24.13 v76.2,24.13
  Bottom 0.254: U5.6 74.5,23.07
  Bottom 0.305: 74.5,23.07 75.56,24.13 v76.2,24.13 R57.2
ESP_DTR  (via drill 0.5)
  Top 0.254: 6.16,48.07 6.35,48.26
  Top 0.305: IC1.14 37.89,27.52 38.73,26.67 v38.73,26.04
  Top 0.406: P3_ESP32_PROG.3 6.16,48.07 | v8.89,45.53 6.96,45.53 6.35,46.16 6.35,48.26 R30.1 | 9.06,45.7 v8.89,45.53 | v8.89,45.53 9.08,45.53 10.16,44.45 11.26,44.45 T4.C
  Bottom 0.2: v8.89,45.53 8.89,45.72
  Bottom 0.406: v38.73,26.04 38.73,27.94 34.29,32.38 14.61,32.38 8.89,38.1 v8.89,45.53
ESP_EN
  Top 0.406: U1.3 14.05,55.96 11.85,53.76 R14.1 | C5.2 R14.1 | T3.C 11.26,53.59 R14.1
ESP_RTS  (via drill 0.5)
  Top 0.305: IC1.15 37.39,26.75 v37.47,26.67
  Top 0.406: R31.1 8.89,48.9 | 8.89,48.9 8.26,48.9 v7.62,48.26 | T3.E 9.06,49.06 8.89,48.9
  Bottom 0.2: 7.33,46.07 7.62,46.35
  Bottom 0.406: v37.47,26.67 33.02,31.11 14.61,31.11 7.62,38.1 7.62,46.35 v7.62,48.26 | P3_ESP32_PROG.4 7.33,46.07
ESP_RX  (via drill 0.5)
  Top 0.2: IC1.16 36.8,28.61 34.92,30.48 34.92,33.34 34.61,33.66 v34.61,34.92
  Top 0.406: v40.64,45.09 37.47,45.09 35.56,46.99 R11.2
  Bottom 0.406: v34.61,34.92 34.61,35.88 40.64,41.91 v40.64,45.09
ESP_RXD  (via drill 0.5)
  Top 0.305: 35.77,53.34 v35.56,53.34
  Top 0.406: U1.34 34.21,53.42 34.29,53.34 v35.56,53.34 R11.1
  Bottom 0.254: 34.37,54.61 34.37,54.53
  Bottom 0.406: 34.37,54.61 8.26,54.61 3.71,50.07 P3_ESP32_PROG.2 | 34.37,54.53 v35.56,53.34
ESP_TX  (via drill 0.5)
  Top 0.2: IC1.17 34.89,27.34 34.29,27.94 34.29,33.02 33.34,33.97 v33.34,34.92
  Top 0.406: R12.2 37.47,48.26 v39.37,46.35
  Bottom 0.406: v33.34,34.92 33.34,35.88 39.37,41.91 v39.37,46.35
ESP_TXD  (via drill 0.5)
  Top 0.406: R12.1 37.47,54.61 37.33,54.69 U1.35 31.75,54.69 v30.48,55.88
  Bottom 0.406: P3_ESP32_PROG.1 3.81,52.07 7.62,55.88 v30.48,55.88
FB
  Top 0.305: U3.10 15.61,15.61 16.51,16.51 R6.2 R1.1
FB1
  Bottom 0.305: U5.10 74.5,19.48 76.2,17.78 76.83,17.78 | 76.83,17.78 R56.2 | R55.1 76.83,17.78
GND  (via drill 0.5)
  Top 0.2: U3.4 13.45,14.11 13.59,13.97 | U3.11 13.59,15.24 13.59,14.86 U3.15 | U3.14 U3.13 13.59,11.81 | 26.67,31.11 26.79,31 U$1.1 27.42,31 27.3,31.11 | U$1.25 29.8,30.2 U$1.22 29.8,32.34 30.16,32.7 | 32.92,32.7 C24.2
  Top 0.254: R44.1 48.9,8.89 | U1.GND v24.77,50.16 | U3.9 13.72,15.11 13.59,15.24 | C16.1 37.38,31.62 C15.1 38.1,30.48 38.39,30.19 IC1.13 38.39,27.65 38.73,27.3 39.37,27.3 v40.01,26.67
  Top 0.305: U3.11 13.59,17.55 C4.2 13.09,17.52 U3.12 | U3.13 13.59,13.97 13.59,14.61 U3.15
  Bottom 0.406: SJ2.3 28.83,20.07 v29.21,20.32
  other vias: 15.24,17.78 30,30 46.35,34.29 27.94,17.14 22.23,52.7 22.23,48.9 26.04,48.9 26.04,52.7 24.77,51.44 6.99,57.78 12.7,52.07 20.95,58.42 27.94,58.42 36.83,58.42 51.44,51.44 42.55,47.62 48.26,41.91 54.61,38.73 52.7,19.68 53.34,10.79 51.44,2.54 48.26,5.71 41.91,5.71 19.68,1.91 41.27,20.95 45.09,27.3 20.95,5.08 6.99,5.08 17.14,8.26 13.34,14.61 13.02,28.89 12.7,40.64 21.59,33.66 48.26,27.94 38.42,34.61 23.5,48.9 24.77,48.9 22.23,50.16 23.5,50.16 26.04,50.16 22.23,51.44 23.5,51.44 23.5,52.7 24.77,52.7 26.04,51.44 25.4,29.84 14.61,24.77 15.88,24.77 17.14,24.77 3.17,26.67
  pour Top: 0,60.33 60.33,60.33 60.33,0 0,0
  pour Bottom: 0,60.33 60.33,60.33 60.33,0 0,0
GND1  (via drill 0.5)
  Bottom 0.254: U5.9 75.43,21.09 | U5.13 73.28,24.52 v73.03,24.77 72.78,24.52 U5.14 | U5.11 73.28,18.66 v73.03,18.41 72.78,18.66 U5.12
  Bottom 0.305: 75.43,21.09 v76.2,20.32 | U5.4 72.53,22.09 U5.15 72.78,21.34 U5.12
  Bottom 0.406: U$3.5 90.83,21.56 90.81,21.59 90.81,20.32
  other vias: 73.03,21.59 93.34,16.51 93.34,29.21
  pour Top: 61.59,2.54 61.59,43.18 92.08,43.18 92.08,31.75 98.42,29.21 98.42,16.51 92.08,13.97 92.08,2.54
  pour Bottom: 61.59,2.54 61.59,43.18 92.08,43.18 92.08,31.75 98.42,29.21 98.42,16.51 92.08,13.97 92.08,2.54
IO0  (via drill 0.5)
  Top 0.406: v33.02,40.64 33.02,41.91 32.94,41.99 U1.25 35.98,41.99 R13.1 | T4.E 10.48,47.31 v9.53,46.99
  Bottom 0.406: v9.53,46.99 15.88,40.64 v33.02,40.64
IO2
  Top 0.406: U1.24 29.84,38.1 29.21,37.47 R15.1
LIDAR_PWM  (via drill 0.5)
  Top 0.305: IC1.51 39.58,20.11 v38.1,21.59
  Top 0.406: R7.2 v10.79,27.94
  Bottom 0.406: v10.79,27.94 24.77,27.94 30.48,22.23 37.47,22.23 v38.1,21.59
LIDAR_RX
  Top 0.305: IC1.53 50.32,21.11 53.34,24.13 R10.2
LIDAR_TX
  Top 0.305: IC1.52 51.09,20.61 52.7,22.23 R8.2
M1
  Top 0.254: R38.1 14.61,38.73 23.5,29.84 23.5,20.32 24.77,19.05 29.21,19.05 30.27,20.11 IC1.30
M2
  Top 0.254: R37.1 15.24,36.83 22.86,29.21 22.86,19.68 27.94,14.61 35.56,14.61 36.89,15.94 IC1.33
M3
  Top 0.254: R36.1 15.88,34.92 22.23,28.57 22.23,19.05 27.3,13.97 35.56,13.97 37.39,15.8 IC1.34
M4
  Top 0.254: R35.1 16.51,33.02 21.59,27.94 21.59,18.41 26.67,13.34 35.56,13.34 37.89,15.66 IC1.35
M5
  Top 0.254: R34.1 17.14,31.11 20.95,27.3 20.95,17.78 26.04,12.7 35.56,12.7 38.39,15.53 IC1.36
MPU_INT  (via drill 0.5)
  Top 0.2: U$1.12 31,25.52 v31.11,25.4
  Top 0.305: IC1.57 43.43,23.11 42.16,21.84 39.76,21.84 v38.1,23.5
  Bottom 0.406: v31.11,25.4 33.02,23.5 v38.1,23.5
N$1
  Top 0.305: U3.1 11.86,17.59 C4.1
N$2
  Top 0.305: U3.3 9.53,14.61 8.89,15.24 L1.P$1
N$3
  Top 0.254: U$1.20 30.6,32.51 31.11,33.02 C28.2
N$4
  Top 0.305: 6.72,22.77 Q1.3
  Top 0.813: P4_LIDAR_MOTOR.2 3.17,23.18 3.17,22.77 6.72,22.77
N$5
  Top 0.2: 7.93,27.2 R7.1
  Top 0.406: Q1.1 7.93,27.2
N$6
  Top 0.406: R8.1 55.78,22.23 P1_LIDAR_DATA.2
N$7
  Top 0.406: P1_LIDAR_DATA.3 56.07,25.59 55.46,24.98 R10.1
N$8
  Top 0.61: R9.2 D4.C
N$9
  Top 0.2: U$1.10 30.2,27.02 29.21,26.04 29.21,25.82 C23.1
N$10
  Top 0.254: IC1.8 40.89,39.62 45.09,43.81 55.56,43.81 56.93,45.18 P2_ACTOR1.2
N$11
  Top 0.305: U2.5 13,8.57 R5.1
N$12
  Top 0.406: P2_ACTOR.5 5,31.37 Q4.3
N$13
  Top 0.406: R31.2 12.28,46.92 T4.B
N$14
  Top 0.305: U2.1 8.86,10.14 R9.1
N$15
  Top 0.406: P2_ACTOR.4 6.17,33.37 Q5.3
N$16
  Top 0.254: IC1.6 41.89,37.45 Q2.1
  Top 0.406: Q2.1 47.84,40.01 R17.1 C17.1
N$17
  Top 0.406: P2_ACTOR.3 5.7,35.37 Q6.3
N$18
  Top 0.406: P2_ACTOR.2 4.52,37.37 Q7.3
N$19
  Top 0.2: 48.48,36.2 C18.1
  Top 0.254: IC1.5 42.39,32.87 Q2.2
  Top 0.406: Q2.2 45.72,36.2 48.48,36.2 | C18.1 R17.2
N$20
  Top 0.254: IC1.4 42.89,30.19 Q3.1
  Bottom 0.2: 43.81,32.8 C19.2
  Bottom 0.406: Q3.1 43.81,32.8
N$21
  Top 0.254: IC1.3 43.39,29.42 43.81,29.84 45.09,29.84 Q3.2
  Bottom 0.2: 46.35,32.8 C20.2
  Bottom 0.406: Q3.2 46.35,32.8
N$22
  Top 0.305: 36.15,6.77 T2.C | 38.69,6.82 R20.2 | 33.34,6.45 R23.1
  Top 0.406: R23.1 36.15,6.77 | T2.C 38.69,6.82 | T1.B 33.34,6.45
N$23  (via drill 0.5)
  Top 0.406: R21.1 51.65,28.16 52.07,28.57 SJ1.2
  other vias: 52.07,29.84
N$24  (via drill 0.5)
  Top 0.305: R22.1 v27.94,21.59
  Bottom 0.305: SJ2.2 v27.94,21.59
N$25
  Top 0.406: 3.35,39.37 Q8.3
  Top 0.61: P2_ACTOR.1 3.35,39.37
N$26
  Top 0.305: 31.43,6.46 R25.2
  Top 0.406: T1.E 31.43,6.46
N$27
  Top 0.305: 33.86,8.68 R23.2
  Top 0.406: R24.1 33.86,8.68
N$28
  Top 0.305: 34.92,4.29 T2.B
  Top 0.406: 34.92,4.29 R27.2 R26.1
N$29
  Top 0.406: R30.2 8.96,52.28 T3.B
N$30
  Bottom 0.813: SJ3.2 3.33,29.21 P2_ACTOR.6
N$31
  Top 0.406: Q4.1 10.27,28.89 R34.2
N$32
  Top 0.305: 12.06,33.02 R35.2
  Top 0.406: Q5.1 11.11,32.07 12.06,33.02
N$33
  Top 0.406: Q6.1 11.11,35.24 11.43,34.92 R36.2
N$34
  Top 0.406: Q7.1 9.84,38.42 11.43,36.83 R37.2
N$35
  Top 0.406: Q8.1 9.84,41.59 12.06,39.37 12.06,39.16 R38.2
N$36
  Top 0.254: IC1.9 40.39,40.39 45.09,45.09 55.24,45.09 56.58,46.42 | 56.58,46.42 57.02,46.86 | P2_ACTOR1.3 57,47 56.5,46.5 56.58,46.42
N$37
  Top 0.254: IC1.10 39.89,41.16 45.09,46.35 54.61,46.35 57.12,48.86 P2_ACTOR1.4
N$38
  Top 0.254: IC1.11 39.39,41.93 44.83,47.37 53.4,47.37 56.9,50.86 P2_ACTOR1.5
N$39  (via drill 0.5)
  Top 0.254: D5.A 43.18,56.77 P2_ACTOR2.5
  Top 0.406: U1.10 16.43,47.07 v16.51,46.99
  Bottom 0.254: 42.8,56.77 P2_ACTOR2.5
  Bottom 0.406: v16.51,46.99 33.02,46.99 42.8,56.77
N$40  (via drill 0.5)
  Top 0.254: D3.A 45.09,56.87 P2_ACTOR2.4
  Top 0.406: U1.11 16.43,45.8 v16.51,45.72
  Bottom 0.254: P2_ACTOR2.4 44.8,56.87
  Bottom 0.406: v16.51,45.72 33.02,45.72 43.18,55.88 43.81,55.88 44.8,56.87
N$41  (via drill 0.5)
  Top 0.254: D2.A 46.99,56.96 P2_ACTOR2.3
  Top 0.406: U1.12 16.43,44.53 v16.51,44.45
  Bottom 0.254: P2_ACTOR2.3 46.8,56.96
  Bottom 0.406: v16.51,44.45 33.02,44.45 43.18,54.61 44.45,54.61 46.8,56.96
N$42  (via drill 0.5)
  Top 0.254: D1.A 48.9,57.05 P2_ACTOR2.2
  Top 0.406: U1.13 16.43,43.26 v16.51,43.18
  Bottom 0.406: v16.51,43.18 33.02,43.18 43.18,53.34 45.72,53.34 48.8,56.42 P2_ACTOR2.2
N$43
  Top 0.254: D1.C R39.1
N$44
  Top 0.254: D2.C R40.1
N$45
  Top 0.254: D3.C R41.1
N$46
  Top 0.254: D5.C R42.1
N$47  (via drill 0.5)
  Top 0.61: R45.2 v73.03,36.83
  Bottom 0.61: Q9.1 72.86,37 v73.03,36.83
N$48  (via drill 0.5)
  Top 0.254: IC1.37 38.89,15.39 37.47,13.97 v37.47,13.34
  Top 0.61: D6.C v41.91,6.99
  Bottom 0.406: v37.47,13.34 37.47,11.43 v41.91,6.99
N$49  (via drill 0.5)
  Top 0.305: IC1.38 39.39,13.99 v38.73,13.34
  Top 0.61: D7.C v41.91,8.89
  Bottom 0.406: v38.73,13.34 38.73,12.06 v41.91,8.89
N$50
  Top 0.61: D6.A R43.2
N$51
  Top 0.61: R44.2 D7.A
N$52  (via drill 0.5)
  Top 0.61: R46.2 v78.11,36.83
  Bottom 0.61: Q10.1 77.94,37 v78.11,36.83
N$53  (via drill 0.5)
  Top 0.61: R47.2 v83.19,36.83
  Bottom 0.61: Q11.1 83.02,37 v83.19,36.83
N$54
  Bottom 0.61: Q9.3 SV3.1
N$55
  Bottom 0.61: Q10.3 SV3.3
N$56
  Bottom 0.61: Q11.3 SV3.5
N$57  (via drill 0.5)
  Top 0.61: Q12.1 71.44,7.94 v72.39,6.99
  Bottom 0.406: R48.2 71.54,7.83 v72.39,6.99
N$58  (via drill 0.5)
  Top 0.61: Q13.1 76.52,8.57 v78.11,8.89
  Bottom 0.406: R49.2 v78.11,8.89
N$59  (via drill 0.5)
  Top 0.61: Q14.1 83.02,8.72 v83.19,8.89
  Bottom 0.61: R50.2 v83.19,8.89
N$60
  Top 0.61: Q12.3 SV4.1
N$61
  Top 0.61: Q13.3 SV4.3
N$62
  Top 0.61: Q14.3 SV4.5
N$63
  Bottom 0.406: U4.5 84.48,22.04 R52.1
N$64  (via drill 0.5)
  Top 0.406: v75.56,30.48 75.56,27.94 v80.64,22.86
  Bottom 0.406: U4.1 80.97,23.18 v80.64,22.86 | R51.1 v75.56,30.48
N$65
  Bottom 0.406: D8.C 81.92,27.94 79.38,30.48 R51.2
N$66
  Bottom 0.305: U5.3 69.22,21.59 67.94,20.32 68.17,20.32 L3.P$1
N$67
  Bottom 0.305: U5.1 71.55,17.14 C33.1
NRST  (via drill 0.5)
  Top 0.254: C14.2 R16.1 | 53.55,15.77 53.34,15.56 v53.34,15.62
  Top 0.305: IC1.7 41.39,23.61 v41.27,23.5
  Top 0.406: R16.1 53.55,15.77
  Bottom 0.406: SWD.5 v53.34,15.62 49.15,15.62 v41.27,23.5
SCL  (via drill 0.5)
  Top 0.2: U$1.23 29.4,33.53 v28.57,34.29
  Top 0.254: R32.2 53.55,34.05
  Top 0.305: IC1.58 47.51,23.61 v48.26,22.86 49.53,22.86 53.98,27.3 53.98,33.63 53.55,34.05
  Top 0.406: P2.3 56.7,35.75 55.24,34.29 R32.2
  Bottom 0.305: v28.57,34.29 30.48,33.02 36.83,33.02 46.35,22.86 v48.26,22.86
SDA  (via drill 0.5)
  Top 0.2: 46.37,24.12 46.35,24.13 | IC1.59 48.24,24.11 v48.26,24.13 v48.25,24.12 | U$1.24 29,32.17 26.67,34.29 v26.67,34.92
  Top 0.305: 53.34,31.75 53.34,27.94 49.53,24.13 v48.26,24.13 | 46.37,24.12 v48.25,24.12
  Top 0.406: 53.34,31.75 v52.7,32.38 | P2.4 56.16,37.75 54.61,36.2 R33.2
  Bottom 0.305: v26.67,34.92 27.3,35.56 29.84,35.56 31.75,33.66 37.47,33.66 46.35,24.13 v48.26,24.13
  Bottom 0.406: P2.4 54.9,37.12 52.7,34.92 v52.7,32.38
SWCLK  (via drill 0.5)
  Top 0.2: IC1.49 46.35,19.07 46.97,19.07
  Top 0.305: 46.97,19.07 47.62,18.41 v47.62,12.7
  Bottom 0.406: SWD.2 50.7,9.62 v47.62,12.7
SWDIO  (via drill 0.5)
  Top 0.305: IC1.46 43.39,12.49 44.45,11.43 v51.44,11.43
  Bottom 0.406: SWD.4 53.62,13.62 v51.44,11.43
TRACESWO  (via drill 0.5)
  Top 0.305: IC1.55 44.97,22.11 v44.45,21.59
  Bottom 0.406: SWD.6 48.42,17.62 v44.45,21.59
UART1_TX  (via drill 0.5)
  Top 0.305: IC1.42 41.39,15.36 v40.96,14.92
  Bottom 0.406: P1_GPS.2 44.55,8.16 40.01,13.02 40.01,13.97 v40.96,14.92
UART2_RX  (via drill 0.5)
  Top 0.305: IC1.43 41.89,14.27 v41.27,13.65
  Bottom 0.305: 46.35,2.73 P1_GPS.3
  Bottom 0.406: v41.27,13.65 46.35,8.26 46.35,2.73
USB_D+
  Top 0.305: IC1.45 42.89,12.41 41.91,11.43 33.02,11.43 31.75,10.16 R25.1 | 31.75,8.26 R25.1 | R18.2 30.06,8.47 30.48,8.26 31.54,8.26 R25.1
USB_D-
  Top 0.305: IC1.44 42.39,13.18 41.27,12.06 31.75,12.06 30.06,10.38 R19.2
USBP_E  (via drill 0.5)
  Top 0.254: 26.92,23.11 26.29,23.11
  Top 0.305: IC1.24 26.92,23.11 | 26.29,23.11 v24.77,21.59
  Top 0.61: R28.1 R29.2 23.28,11.01 v23.5,11.43
  Bottom 0.406: v23.5,11.43 23.5,20.32 v24.77,21.59
UVLO
  Top 0.305: 16.93,13.97 R3.1 R4.2 | 16.93,13.97 C2.2 | U3.7 16.8,14.11 16.93,13.97
UVLO1  (via drill 0.5)
  Top 0.305: v76.83,21.59 74.3,24.13 v74.3,26.04
  Bottom 0.254: U5.7 76.33,22.09
  Bottom 0.305: 76.33,22.09 v76.83,21.59 | C32.2 73.88,26.45 v74.3,26.04
  Bottom 0.406: R54.2 v76.83,21.59 | R53.1 C32.2
VBATT  (via drill 0.5)
  Top 0.254: U3.5 11.06,13.61
  Top 0.305: 8.76,6.57 U2.3 | C10.1 8.76,5.08 | R3.2 18.63,13.97 | 18.63,13.97 C2.1 | v17.78,13.97 18.63,13.97
  Top 0.406: 11.06,13.61 10.16,12.7 9.29,12.7 L1.P$2
  Top 0.61: L1.P$2 7.85,13.11 v7.62,13.34 6.35,13.34 | 6.35,11.43 6.35,13.34 | 6.35,13.34 R2.1 | P4_PWRSW2.1 6.35,11.11 6.35,11.43 | 6.35,11.43 6.35,7.62 7.3,6.67 U2.3 | C1.1 8.76,5.08 8.76,6.57
  Bottom 0.406: v7.62,13.34 17.14,13.34 v17.78,13.97
VBATT1  (via drill 0.5)
  Top 1.016: P4_PWRSW3.1 89.53,35.56 v80.64,26.67
  Bottom 0.305: U5.5 67.94,22.59
  Bottom 0.406: U4.3 79.69,25.08 79.38,25.4 | R57.1 79.38,24.13 | 79.38,26.67 79.38,28.57 73.03,28.57 | 73.03,28.57 70.48,28.57 | L3.P$2 67.94,27.94 68.58,28.57 70.48,28.57 | 70.48,28.57 R53.2 70.48,27.94 | C34.1 67.94,25.4 L3.P$2 | L3.P$2 67.94,22.86 67.84,22.99 | 67.84,22.99 L3.P$2 | C32.1 73.03,28.57 | R58.2 65.41,16.93 65.41,21.59 66.41,22.59 67.94,22.59 67.84,22.69 67.84,22.99
  Bottom 1.016: 79.38,24.13 79.38,25.4 79.38,26.67 | C30.1 79.38,26.67 | 79.38,26.67 v80.64,26.67
VBUS
  Top 0.305: F1.2 24.1,6.51 U$2.1
VBUS1
  Bottom 0.406: F2.2 88.39,25.4 90.17,25.4 91.41,24.16 U$3.1
VCAP1
  Top 0.305: IC1.31 33.58,19.61 32.38,18.41 C6.1
VCAP2
  Top 0.305: IC1.47 43.89,15.38 C7.1

## Text on the board
tPlace: LiPo | Li- | Li+ | TX | RX | D1 | D2 | D3 | D4 | 5V | GND | D- | D+ | RST | A0 | D0 | D5 | D6 | D7 | D8 | 3V3 | EN